# Altium PCB Module1.PcbDoc
Units mil, origin at the board's own origin, x right, y up, seen from the top; angles counter-clockwise.
Board outline 1610 x 1300 mil, 2 copper layers (Top Layer, Bottom Layer); 24 components, 25 nets, 148 pads, 47 vias.
Unrouted connection lines stored in the file: 46.
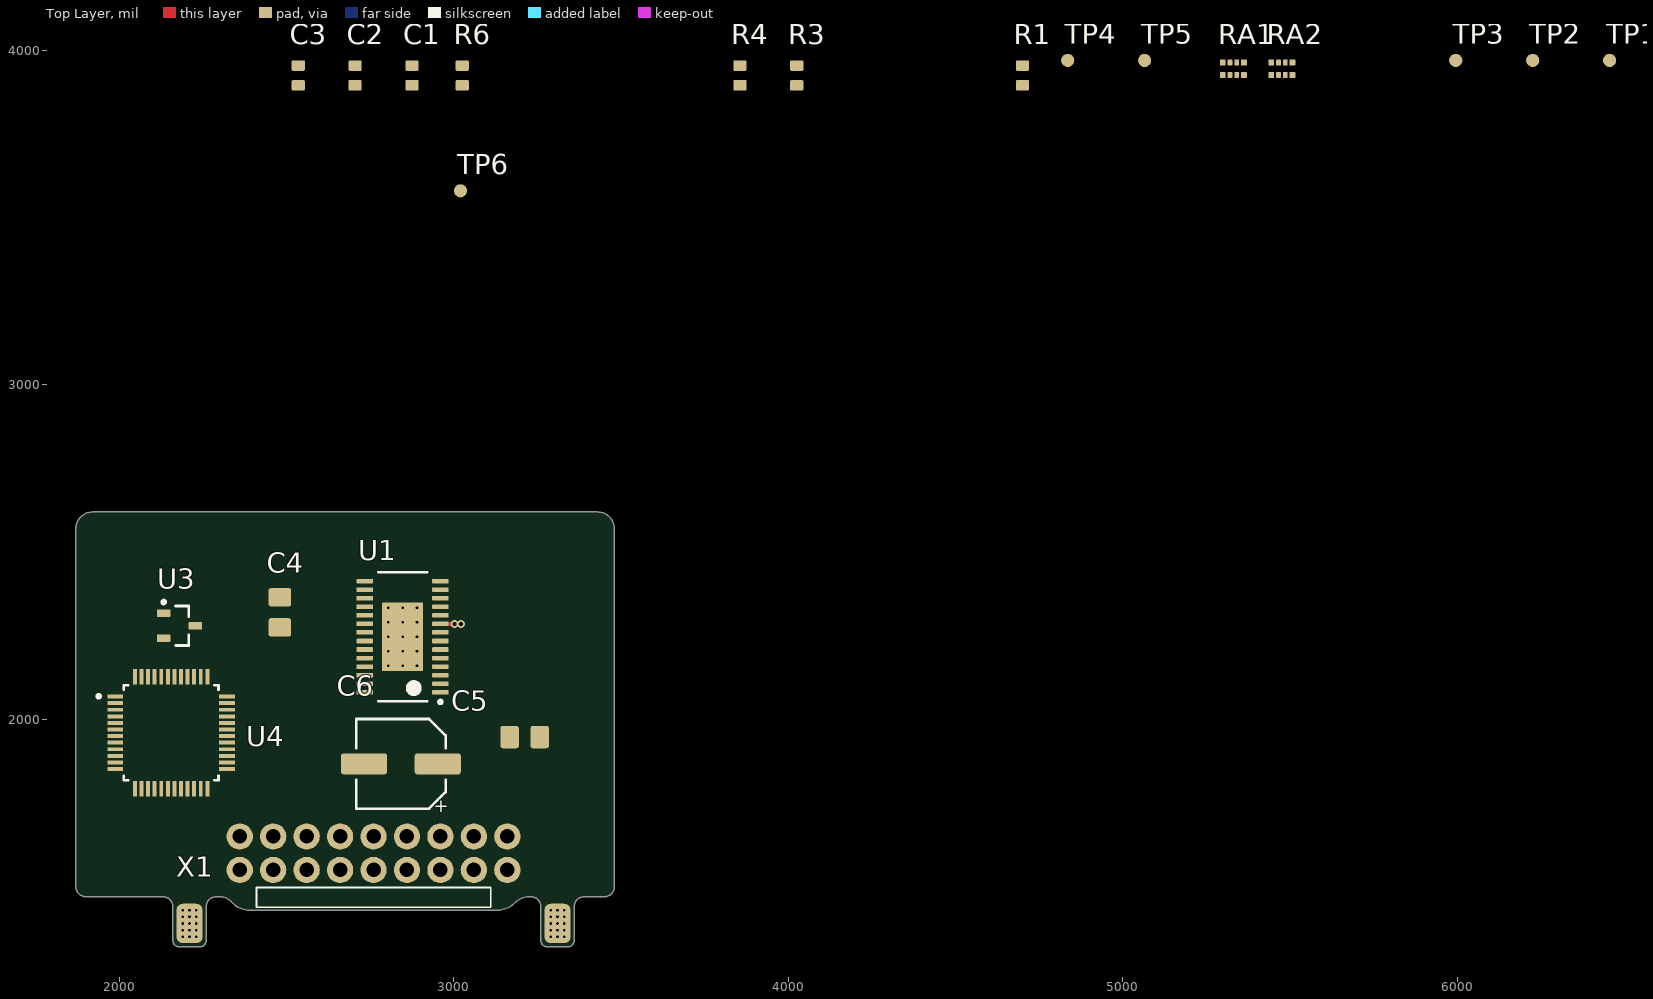
[diagram p0: Top Layer view]
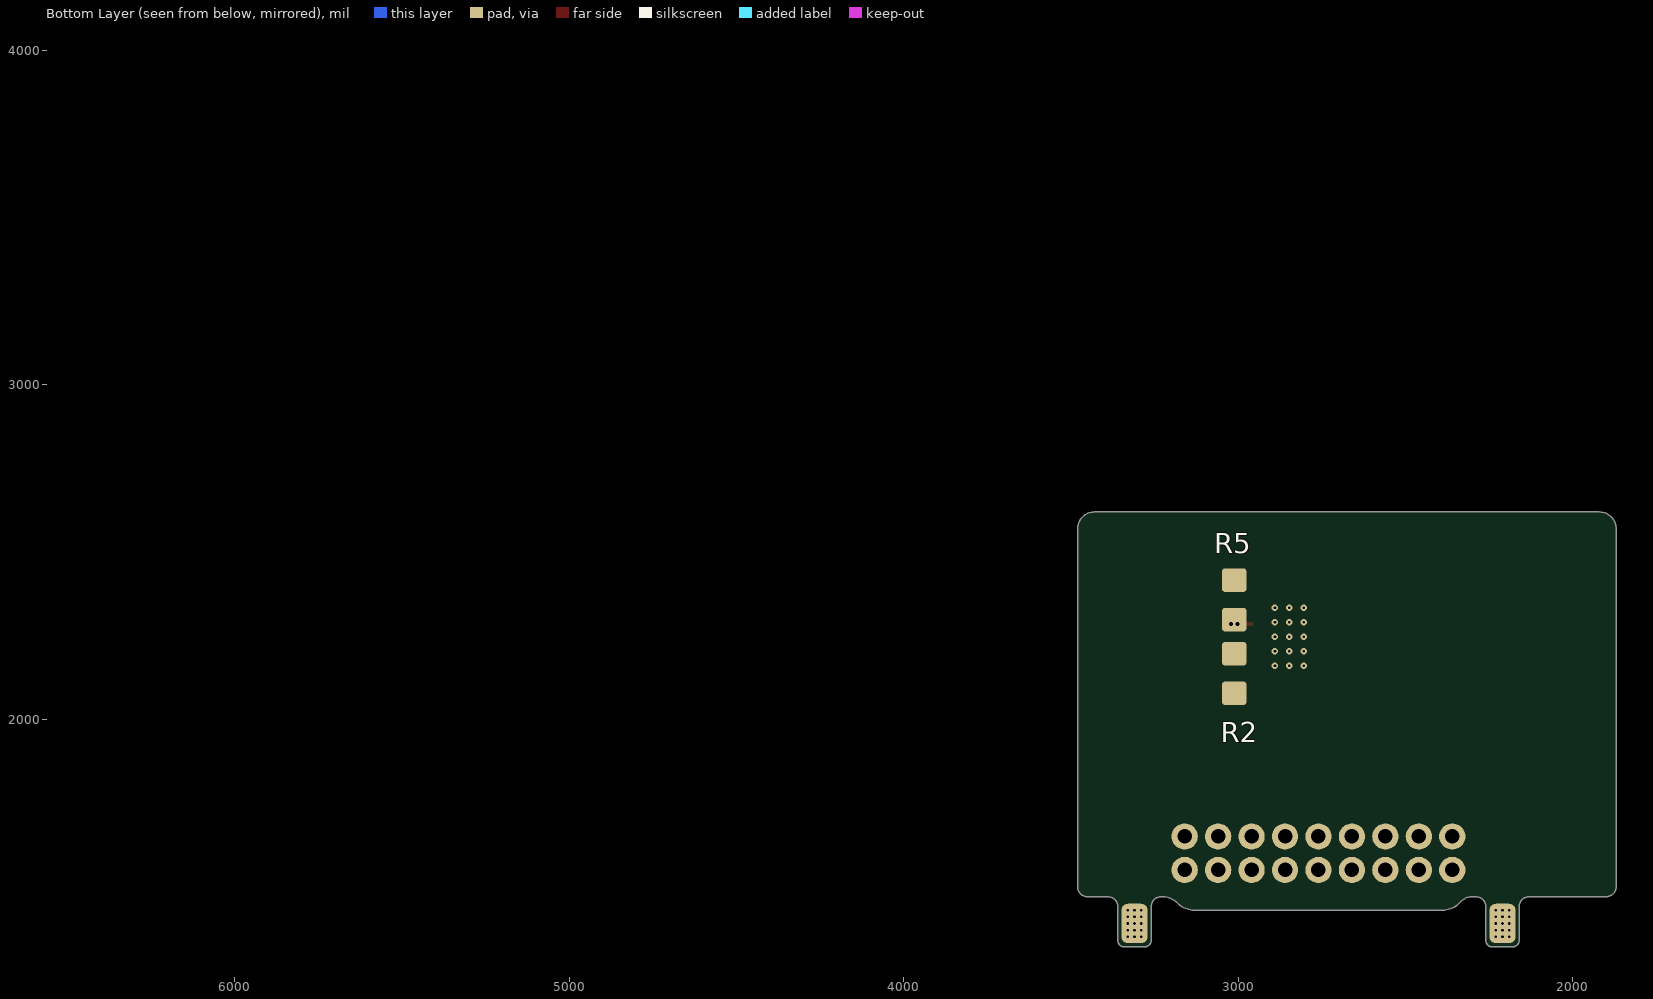
[diagram p1: Bottom Layer view, seen from below]

## Layer stack, top to bottom
Top Solder: solder mask 0.4, Solder Resist, Dk 3.5
Top Layer: signal copper 1.4
Dielectric 1: dielectric 12.6, FR-4, Dk 4.8
Bottom Layer: signal copper 1.4
Bottom Solder: solder mask 0.4, Solder Resist, Dk 3.5

## Board outline
2160,1340 ccw(c2180,1340) 2180,1320 2240,1320 ccw(c2240,1340) 2260,1340 2260,1440 cw(c2290,1440) 2290,1470 2300,1470 cw(c2300,1421.72) 2334.14,1455.86 2340,1450 ccw(c2388.28,1498.28) 2388.28,1430 3131.72,1430 ccw(c3131.72,1498.28) 3180,1450 cw(c3228.28,1401.72) 3228.28,1470 3230,1470 cw(c3230,1440) 3260,1440 3260,1340 ccw(c3280,1340) 3280,1320 3340,1320 ccw(c3340,1340) 3360,1340 3360,1440 cw(c3390,1440) 3390,1470 3450,1470 ccw(c3450,1500) 3480,1500 3480,2570 ccw(c3430,2570) 3430,2620 1920,2620 ccw(c1920,2570) 1870,2570 1870,1500 ccw(c1900,1500) 1900,1470 2130,1470 cw(c2130,1440) 2160,1440

## Design rules (kind name [scope] priority, off if disabled: settings)
AcuteAngle [All] p1: minimum=3.50000000000000E+0001 checktracksonly=FALSE
BoardOutlineClearance "BoardOutlineClearance 1" [All] p1: gap=9.84 ignorepadtopadclearanceinfootprint=FALSE except(0: Arc-SplitContinuation Track-SplitContinuation SMDPad-SplitContinuation THPad-SplitContinuation Via-SplitContinuation Fill-SplitContinuation Poly-SplitContinuation Region-SplitContinuation Text-SplitContinuation) // Milling
BoardOutlineClearance "BoardOutlineClearance 2" [All] p2: gap=15.75 ignorepadtopadclearanceinfootprint=FALSE except(0: Arc-SplitContinuation Track-SplitContinuation SMDPad-SplitContinuation THPad-SplitContinuation Via-SplitContinuation Fill-SplitContinuation Poly-SplitContinuation Region-SplitContinuation Text-SplitContinuation) // V-Cut
Clearance ADC_learance [InNetClass('ADC') vs NOT InNetClass('ADC')] p1: gap=39.37 ignorepadtopadclearanceinfootprint=FALSE
Clearance HV_clearance [InNetClass('Power_line') vs Not InNetClass('Power_line')] p2: gap=23.62 ignorepadtopadclearanceinfootprint=FALSE
Clearance "Clearance 105 um" [All] p3 off: gap=13.78 ignorepadtopadclearanceinfootprint=FALSE except(9.84: Arc-Hole Track-Hole SMDPad-Hole THPad-Hole Via-Hole Fill-Hole Poly-Hole Region-Hole Text-Hole)
Clearance "Clearance 70 um" [All] p4 off: gap=11.81 ignorepadtopadclearanceinfootprint=FALSE except(9.84: Arc-Hole Track-Hole SMDPad-Hole THPad-Hole Via-Hole Fill-Hole Poly-Hole Region-Hole Text-Hole)
Clearance "Clearance-1 35 um" [All] p5: gap=7.87 ignorepadtopadclearanceinfootprint=FALSE except(9.84: Arc-Hole Track-Hole SMDPad-Hole THPad-Hole Via-Hole Fill-Hole Poly-Hole Region-Hole Text-Hole) // Standart
Clearance "Clearance-2 35 um" [All] p6 off: gap=5.91 ignorepadtopadclearanceinfootprint=FALSE except(7.87: Arc-Fill Arc-Poly Track-Fill Track-Poly SMDPad-Fill SMDPad-Poly THPad-Fill THPad-Poly Via-Fill Via-Poly Fill-Fill Fill-Poly Poly-Poly; 9.84: Arc-Hole Track-Hole SMDPad-Hole THPad-Hole Via-Hole Fill-Hole Poly-Hole Region-Hole Text-Hole) // Advance
Clearance "Clearance-1 18 um" [All] p7 off: gap=4.92 ignorepadtopadclearanceinfootprint=FALSE except(7.87: Arc-Fill Arc-Poly Track-Fill Track-Poly SMDPad-SMDPad SMDPad-Fill SMDPad-Poly THPad-Fill THPad-Poly Via-Fill Via-Poly Fill-Fill Fill-Poly Poly-Poly Poly-Region Poly-Text; 9.84: Arc-Hole Track-Hole SMDPad-Hole THPad-Hole Via-Hole Fill-Hole Poly-Hole Region-Hole Text-Hole) // Standart
Clearance "Clearance-2 18 um" [All] p8 off: gap=3.94 ignorepadtopadclearanceinfootprint=FALSE except(5.91: Arc-Fill Arc-Poly Track-Fill Track-Poly SMDPad-SMDPad SMDPad-Fill SMDPad-Poly THPad-Fill THPad-Poly Via-Fill Via-Poly Fill-Fill Fill-Poly Poly-Poly Poly-Region Poly-Text; 9.84: Arc-Hole Track-Hole SMDPad-Hole THPad-Hole Via-Hole Fill-Hole Poly-Hole Region-Hole Text-Hole) // Advance
ComponentClearance [All] p1 off: gap=10 collisioncheckmode=3 verticalgap=10 showdistances=FALSE
DiffPairsRouting "DiffPairsRouting 35 um" [All] p1: maxlimit=10 minlimit=7.87 mostfreqgap=10 toplayer_minwidth=7.87 toplayer_maxwidth=15 toplayer_prefwidth=15 bottomlayer_minwidth=7.87 bottomlayer_maxwidth=15 bottomlayer_prefwidth=15 maxuncoupledlength=500
DiffPairsRouting "DiffPairsRouting 18 um" [All] p2 off: maxlimit=10 minlimit=3.94 mostfreqgap=10 toplayer_minwidth=3.94 toplayer_maxwidth=15 toplayer_prefwidth=15 bottomlayer_minwidth=3.94 bottomlayer_maxwidth=15 bottomlayer_prefwidth=15 maxuncoupledlength=500
HoleSize "Minimum HoleSize" [IsPad] p1: absolutevalues=TRUE maxlimit=232.28 minlimit=23.62 maxpercent=80.000 minpercent=20.000
HoleSize "Minimum HoleSize VIA 1" [IsVia] p2: absolutevalues=TRUE maxlimit=232.28 minlimit=11.81 maxpercent=80.000 minpercent=20.000 // Standart
HoleSize "Minimum HoleSize VIA 2" [IsVia] p3 off: absolutevalues=TRUE maxlimit=232.28 minlimit=7.87 maxpercent=80.000 minpercent=20.000 // Advance
HoleToHoleClearance Hole2HoleClearance [All] p1: gap=9.84 allowstackedmicrovias=FALSE
MinimumAnnularRing "Minimum AR VIA Standart" [All] p1: minimumring=5.91
MinimumAnnularRing "Minimum AR PAD Standart" [IsPAD] p2: minimumring=7.87
MinimumAnnularRing "Minimum AR VIA Advance" [IsVia] p3 off: minimumring=3.94
MinimumAnnularRing "Minimum AR PAD Advance" [IsPAD] p4 off: minimumring=5.91
MinimumSolderMaskSliver "SolderMask Bridge Standart" [All] p1: minsoldermaskwidth=5.91 // All Masks
MinimumSolderMaskSliver "SolderMask Bridge Advance" [All] p2 off: minsoldermaskwidth=3.94 // Mask LDI
PlaneClearance "PlaneClearance 105 um" [All] p1 off: clearance=13.78
PlaneClearance "PlaneClearance 70 um" [All] p2 off: clearance=11.81
PlaneClearance "PlaneClearance 35 um" [All] p3: clearance=7.87
PlaneClearance "PlaneClearance-1 18 um" [All] p4 off: clearance=7.87 // Standart
PlaneClearance "PlaneClearance-2 18 um" [All] p5 off: clearance=5.91 // Advance
PlaneConnect "TermalConnect 105 um" [All] p1 off: planeconnectstyle=Relief reliefexpansion=7.87 reliefentries=4 reliefconductorwidth=13.78 reliefairgap=13.78 // Standart
PlaneConnect "TermalConnect 70 um" [All] p2 off: planeconnectstyle=Relief reliefexpansion=7.87 reliefentries=4 reliefconductorwidth=11.81 reliefairgap=11.81 // Standart
PlaneConnect "TermalConnect-1 35 um" [All] p3: planeconnectstyle=Relief reliefexpansion=7.87 reliefentries=4 reliefconductorwidth=7.87 reliefairgap=7.87 // Standart
PlaneConnect "TermalConnect-2 35 um" [All] p4 off: pad.planeconnectstyle=Relief pad.reliefexpansion=5.91 pad.reliefentries=4 pad.reliefconductorwidth=7.87 pad.reliefairgap=7.87 via.planeconnectstyle=Direct via.reliefexpansion=5.91 via.reliefentries=4 via.reliefconductorwidth=5.91 via.reliefairgap=5.91 // Advance
PlaneConnect "TermalConnect-1 18 um" [All] p5 off: planeconnectstyle=Relief reliefexpansion=7.87 reliefentries=4 reliefconductorwidth=7.87 reliefairgap=7.87 // Standart
PlaneConnect "TermalConnect-2 18 um" [All] p6 off: pad.planeconnectstyle=Relief pad.reliefexpansion=5.91 pad.reliefentries=4 pad.reliefconductorwidth=5.91 pad.reliefairgap=5.91 via.planeconnectstyle=Direct via.reliefexpansion=5.91 via.reliefentries=4 via.reliefconductorwidth=5.91 via.reliefairgap=5.91 // Advance
PolygonConnect "PolygonConnect 105 um" [All] p1 off: thpad.connectstyle=Relief thpad.reliefconductorwidth=13.78 thpad.reliefentries=4 thpad.polygonreliefangle="90 Angle" thpad.airgapwidth=13.78 smdpad.connectstyle=Relief smdpad.reliefconductorwidth=13.78 smdpad.reliefentries=4 smdpad.polygonreliefangle="90 Angle" smdpad.airgapwidth=13.78 via.connectstyle=Direct via.reliefconductorwidth=10 via.reliefentries=4 via.polygonreliefangle="90 Angle" via.airgapwidth=10
PolygonConnect "PolygonConnect 70 um" [All] p2 off: thpad.connectstyle=Relief thpad.reliefconductorwidth=11.81 thpad.reliefentries=4 thpad.polygonreliefangle="90 Angle" thpad.airgapwidth=11.81 smdpad.connectstyle=Relief smdpad.reliefconductorwidth=11.81 smdpad.reliefentries=4 smdpad.polygonreliefangle="90 Angle" smdpad.airgapwidth=11.81 via.connectstyle=Direct via.reliefconductorwidth=10 via.reliefentries=4 via.polygonreliefangle="90 Angle" via.airgapwidth=10
PolygonConnect "PolygonConnect-1 35 um" [All] p3: thpad.connectstyle=Relief thpad.reliefconductorwidth=7.87 thpad.reliefentries=4 thpad.polygonreliefangle="90 Angle" thpad.airgapwidth=7.87 smdpad.connectstyle=Relief smdpad.reliefconductorwidth=7.87 smdpad.reliefentries=4 smdpad.polygonreliefangle="90 Angle" smdpad.airgapwidth=7.87 via.connectstyle=Direct via.reliefconductorwidth=10 via.reliefentries=4 via.polygonreliefangle="90 Angle" via.airgapwidth=10 // Standart
PolygonConnect "PolygonConnect-2 35 um" [All] p4 off: thpad.connectstyle=Relief thpad.reliefconductorwidth=5.91 thpad.reliefentries=4 thpad.polygonreliefangle="90 Angle" thpad.airgapwidth=5.91 smdpad.connectstyle=Relief smdpad.reliefconductorwidth=5.91 smdpad.reliefentries=4 smdpad.polygonreliefangle="90 Angle" smdpad.airgapwidth=5.91 via.connectstyle=Direct via.reliefconductorwidth=10 via.reliefentries=4 via.polygonreliefangle="90 Angle" via.airgapwidth=10 // Advance
PolygonConnect "PolygonConnect-1 18 um" [All] p5 off: thpad.connectstyle=Relief thpad.reliefconductorwidth=5.91 thpad.reliefentries=4 thpad.polygonreliefangle="90 Angle" thpad.airgapwidth=7.87 smdpad.connectstyle=Relief smdpad.reliefconductorwidth=7.87 smdpad.reliefentries=4 smdpad.polygonreliefangle="90 Angle" smdpad.airgapwidth=7.87 via.connectstyle=Direct via.reliefconductorwidth=10 via.reliefentries=4 via.polygonreliefangle="90 Angle" via.airgapwidth=10 // Standart
PolygonConnect "PolygonConnect-2 18 um" [All] p6 off: thpad.connectstyle=Relief thpad.reliefconductorwidth=4.92 thpad.reliefentries=4 thpad.polygonreliefangle="90 Angle" thpad.airgapwidth=5.91 smdpad.connectstyle=Relief smdpad.reliefconductorwidth=4.92 smdpad.reliefentries=4 smdpad.polygonreliefangle="90 Angle" smdpad.airgapwidth=5.91 via.connectstyle=Direct via.reliefconductorwidth=10 via.reliefentries=4 via.polygonreliefangle="90 Angle" via.airgapwidth=10 // Advance
RoutingCorners [All] p1 off: cornerstyle=45-Degree minsetback=10 maxsetback=40
RoutingVias [All] p1: holewidth=11.81 width=23.62 viastyle="Through Hole" minholewidth=7.87 minwidth=15.75 maxholewidth=232.28 maxwidth=251.97 useviatemplates=TRUE viatemplateguid#1={AE845DF9-3FED-4E5E-92F2-E0E628AD4687} viatemplateguid#2={337630FC-0759-4CC8-9604-1508595804AC} viatemplateguid#3={EA74E89B-64FA-4022-B86A-771B67B55223} viatemplatename#1=v40h20m0mx0 viatemplatename#2=v50h20 viatemplatename#3=v60h30m0mx0
SilkToSilkClearance Silk2SilkClearance [All] p1 off: silktosilkclearance=5.91
SilkToSolderMaskClearance Silk2SolderMaskClearance [IsPad] p1 off: minsilkscreentomaskgap=5.91 clearancetoexposedcopper=TRUE
SolderMaskExpansion SolderMaskExpansion-1 [All] p1: expansion=1.97 // Standart
SolderMaskExpansion "SolderMaskExpansion LDI" [All] p2 off: expansion=0.98 // Advance
UnRoutedNet [All] p1: checkbadconnections=TRUE
UnpouredPolygon [All] p1: allowunpoured=TRUE allowshelved=TRUE
Width "Width 105 um" [All] p1 off: maxlimit=393.7 minlimit=13.78 preferedwidth=15.75 checkconnectedcopper=TRUE
Width "Width 70 um" [All] p2 off: maxlimit=393.7 minlimit=11.81 preferedwidth=13.78 minimp=50.000000 maximp=50.000000 favimp=50.000000 checkconnectedcopper=TRUE
Width "Width 35 um" [All] p3: maxlimit=393.7 minlimit=5.91 preferedwidth=7.87
Width "Width 18 um" [All] p4 off: maxlimit=393.7 minlimit=3.94 preferedwidth=4.92 checkconnectedcopper=TRUE
18 further rules are at their usual default settings.

## Classes and differential pairs
component class U_Motor_Module: C1 C2 C3 C4 C5 C6 R1 R2 R3 R4 R5 R6 RA1 RA2 TP1 TP2 TP3 TP4 TP5 TP6 U1
component class Sheet1: U3 U4 X1

## Components (designator, comment, footprint, x,y, rotation, side; value= is the part's Value field where it differs from the comment)
C1 "0,47 мк" CAP_0603 2875,3925 r90 top
C2 "10 н" CAP_0603 2705,3925 r90 top
C3 "0,1 мк" CAP_0603 2535,3925 r90 top
C4 "0,47 мк" CAP_0805 2480,2320 r90 top
C5 "0,1 мк" CAP_0805 3211.81,1947.2 r0 top
C6 "47 мк" CAP_AE_SMD_D6MM3_H5M55 2841.81,1867.2 r180 top
R1 "10 к" RES_0603 4700,3925 r90 top
R2 "100 мОм" RES_1206 3011.81,2137.2 r270 bottom
R3 "10 к" RES_0603 4025,3925 r90 top
R4 "1,5 к" RES_0603 3855,3925 r90 top
R5 "100 мОм" RES_1206 3011.81,2357.2 r90 bottom
R6 "1 к" RES_0603 3025,3925 r90 top
RA1 "RES_ARR-XB-28V" EXB-28V 5330,3945 r90 top
RA2 "RES_ARR-XB-28V" EXB-28V 5475,3945 r90 top
TP1 "SUP" PAD_RND_1MM 6455,3970 r90 top
TP2 "SUP" PAD_RND_1MM 6225,3970 r90 top
TP3 "GND" PAD_RND_1MM 5995,3970 r90 top
TP4 "DECAY" PAD_RND_1MM 4835,3970 r90 top
TP5 "NHOME" PAD_RND_1MM 5065,3970 r90 top
TP6 "CURRENT" PAD_RND_1MM 3020,3580 r90 top
U1 "DRV8825PWP" PWP0028C_L 2846.81,2247.2 r180 top
U3 "REF3030AIDBZR" DBZ0003A_N 2180,2280 r0 top
U4 "STM32G431CBT6" FP-LQFP48-5B-MFG 2155,1960 r0 top
X1 "CNC_PCB_PCB" CNC_PCB_PCB 2360,1650 r0 top locked

## Footprints (in the part's own frame and the unit in brackets; to place one, negate y for a bottom-side part, rotate by r counter-clockwise, add the part's x,y. Pads: shape width x height; smd on the part's side, far side on the other; paste and mask are expansions set on the pad)
CAP_0603 [mm]
  rrect25% 0.8x1 smd: 1(-0.75,0) 2(0.75,0)
  body extent -0.8,-0.4 0.8,0.4, height 0.51
CAP_0805 [mm]
  rrect25% 1.4x1.7 smd: 1(-1.143,0) 2(1.143,0)
  body extent -1.15,-0.76 1.15,0.79, height 1.01
CAP_AE_SMD_D6MM3_H5M55 [mm] "Aluminum Electrolytic Capacitor, Body 6.30x6.60x5.50mm, IPC Low Density"
  rrect25% 3.5x1.6 smd: 1(-2.8,0) 2(2.8,0)
  silkscreen extent -3.4,-3.4 3.4,3.4, body extent -3.4,-3.4 3.4,3.4, height 5.5
CNC_PCB_PCB [mm]
  round 2 hole 1.1: 1(0,0) 2(0,-2.54) 3(2.54,0) 4(2.54,-2.54) 5(5.08,0) 6(5.08,-2.54) 7(7.62,0) 8(7.62,-2.54) 9(10.16,0) 10(10.16,-2.54) 11(12.7,0) 12(12.7,-2.54) 13(15.24,0) 14(15.24,-2.54) 15(17.78,0) 16(17.78,-2.54) 17(20.32,-2.54) 17(20.32,0)
  rrect50% 2x3 smd: 18(-3.81,-6.604) 18(24.13,-6.604)
  rrect50% 2x3 smd far side: 18(-3.81,-6.604) 18(24.13,-6.604)
  silkscreen extent 1.27,-5.37 19.05,-3.87
DBZ0003A_N [mm] "SOT23, 3-Leads, Body 3.04x1.4mm, Pitch 0.95mm, IPC Medium Density"
  rrect17% 1x0.6 smd: 1(-1.2,0.95) 2(-1.2,-0.95) 3(1.2,0)
  silkscreen extent -1.32,-1.5 0.7,1.92, body extent -1.26,-1.46 1.26,1.46, height 0.96
EXB-28V [mm]
  rrect25% 0.45x0.45 smd mask+0.1: 1(-0.475,0.8) 4(-0.475,-0.8) 5(0.475,-0.8) 8(0.475,0.8)
  rrect25% 0.45x0.35 smd mask+0.1: 2(-0.475,0.25) 3(-0.475,-0.25) 6(0.475,-0.25) 7(0.475,0.25)
  body extent -0.5,-1 0.5,1, height 0.45
FP-LQFP48-5B-MFG [mm]
  rect 1.2x0.3 smd paste+0 mask+0: 1(-4.25,2.75) 2(-4.25,2.25) 3(-4.25,1.75) 4(-4.25,1.25) 5(-4.25,0.75) 6(-4.25,0.25) 7(-4.25,-0.25) 8(-4.25,-0.75) 9(-4.25,-1.25) 10(-4.25,-1.75) 11(-4.25,-2.25) 12(-4.25,-2.75) 25(4.25,-2.75) 26(4.25,-2.25) 27(4.25,-1.75) 28(4.25,-1.25) 29(4.25,-0.75) 30(4.25,-0.25) 31(4.25,0.25) 32(4.25,0.75) 33(4.25,1.25) 34(4.25,1.75) 35(4.25,2.25) 36(4.25,2.75)
  rect 0.3x1.2 smd paste+0 mask+0: 13(-2.75,-4.25) 14(-2.25,-4.25) 15(-1.75,-4.25) 16(-1.25,-4.25) 17(-0.75,-4.25) 18(-0.25,-4.25) 19(0.25,-4.25) 20(0.75,-4.25) 21(1.25,-4.25) 22(1.75,-4.25) 23(2.25,-4.25) 24(2.75,-4.25) 37(2.75,4.25) 38(2.25,4.25) 39(1.75,4.25) 40(1.25,4.25) 41(0.75,4.25) 42(0.25,4.25) 43(-0.25,4.25) 44(-0.75,4.25) 45(-1.25,4.25) 46(-1.75,4.25) 47(-2.25,4.25) 48(-2.75,4.25)
  silkscreen extent -5.62,-3.6 3.6,3.6, body extent -4.95,-4.95 4.95,4.95, height 0.25
PAD_RND_1MM [mm]
  round 1 smd paste-0.5 mask+0: 1(0,0)
PWP0028C_L [mm] "SOP, 28-Leads, Body 9.8x4.5mm, Pitch 0.65mm, Thermal Pad 5.18x3.1mm, IPC High Density"
  rrect29% 1.25x0.35 smd: 1(-2.875,4.225) 2(-2.875,3.575) 3(-2.875,2.925) 4(-2.875,2.275) 5(-2.875,1.625) 6(-2.875,0.975) 7(-2.875,0.325) 8(-2.875,-0.325) 9(-2.875,-0.975) 10(-2.875,-1.625) 11(-2.875,-2.275) 12(-2.875,-2.925) 13(-2.875,-3.575) 14(-2.875,-4.225) 15(2.875,-4.225) 16(2.875,-3.575) 17(2.875,-2.925) 18(2.875,-2.275) 19(2.875,-1.625) 20(2.875,-0.975) 21(2.875,-0.325) 22(2.875,0.325) 23(2.875,0.975) 24(2.875,1.625) 25(2.875,2.275) 26(2.875,2.925) 27(2.875,3.575) 28(2.875,4.225)
  rrect3% 3.1x5.18 smd: 29(0,0)
  silkscreen extent -3,-4.9 1.85,5.07, body extent -2.25,-4.9 2.25,4.9, height 1.2
RES_0603 [mm]
  rrect25% 0.8x1 smd: 1(-0.75,0) 2(0.75,0)
  body extent -0.8,-0.43 0.8,0.43, height 0.52
RES_1206 [mm]
  rrect25% 1.8x1.84 smd: 1(-1.5,0) 2(1.5,0)
  body extent -1.6,-0.83 1.6,0.83, height 0.57

## Part data
C1 C2: library part CAP_0805, "Capacitor SMD 0805", Type=CAP_CERAMIC
C3 C4 C5: library part CAP_0805, "Capacitor SMD 0805", Voltage=50, Type=CAP_CERAMIC
C6: library part CAP_ALEL_6.3x5.5, "Capacitor SMD Aluminium Electrolytic 6.3mm Diameter 5.5mm Height", Voltage=50, ChipDip=9000565731, Type=CAP_ELECTROLYTIC
R1 R3 R4 R6: library part RES_0805, "Resistor SMD 0805", Type=RESISTOR
R2 R5: library part RES_1206, "Resistor SMD 1206", Type=RESISTOR
RA1 RA2: "Resistor Array 0402 4 Elements Panasonic EXB-28V", Manufacturer=Panasonic
TP1 TP2 TP3 TP4 TP5 TP6: library part TEST_POINT_RND_1MM, "Test Point Round 1mm (NO BOM)"
  TP1 TP2: CustomTxt=SUP
  TP3: CustomTxt=GND
  TP4: CustomTxt=DECAY
  TP5: CustomTxt=NHOME
  TP6: CustomTxt=CURRENT
U1: library part CMP-1685-00019-1, "Stepper Motor Controller IC, 8.2 to 45 V, -40 to 85 degC, 28-Pin HTSSOP (PWP), Green (RoHS & no Sb/Br), Tube", ComponentLink1Description="Manufacturer URL", ComponentLink1URL=http://www.ti.com/, ComponentLink2Description=Datasheet, ComponentLink2URL=http://www.ti.com/general/docs/lit/getliterature.tsp?genericPartNumber=DRV8825&fileType=pdf, Model=DRV8825PWP, Type=IC
U3: library part CMP-0367-00160-2, "2.048 V, 50 ppm / degC, 50 uA Series (Bandgap) Voltage Reference, -40 to 125 degC, 3-pin SOT-23 (DBZ), Green (RoHS & no Sb/Br)", ComponentLink1Description="Manufacturer URL", ComponentLink1URL=http://www.ti.com/, ComponentLink2Description=Datasheet, ComponentLink2URL=http://www.ti.com/general/docs/lit/getliterature.tsp?genericPartNumber=REF3020&fileType=pdf, ComponentLink3Description="Package Specification", ComponentLink3URL=http://www.ti.com/litv/pdf/mpds108a, ComponentLink4Description="URL Link1", ComponentLink4URL="Samples URL:http://www.ti.com/product/ref3020", Model=REF3030AIDBZR, Type=IC
U4: library part CMP-12105-000030-1, "MAINSTREAM ARM CORTEX-M4+ MCU 17", Ambient Temperature Range High=+85°C, Ambient Temperature Range Low=-40°C, Frequency=170MHz, Manufacturer=STMicroelectronics, Max Junction Temp=+105°C, Max Supply Voltage=3.6V, Min Supply Voltage=1.62V, Package=LQFP48-5B, Temperature="-40°C to +85°C", Automotive=No, Category=IC, ComponentLink2Description=Datasheet, ComponentLink2URL=https://www.st.com/resource/en/datasheet/stm32g431cb.pdf, Core Architecture="Arm Cortex-M4", Data Bus Width=32bits, Device Class L1="Integrated Circuits (ICs)", Device Class L2="Embedded Processors and Controllers", Device Class L3=Microcontrollers, Digikey Description="MAINSTREAM ARM CORTEX-M4+ MCU 17", Height=1.6mm, Interface=I2C,SPI,UART,USART,CAN,USB,LIN,IrDA,I2S, Lead Free=Yes, Manufacturer Part Number=STM32G431CBT6, Memory Size=128KBytes, Memory Type=FLASH, Number Of A/D Converters=1, Number Of Adc Channels=17, Number Of Cores=1, Number Of I2C Channels=3, Number Of I/Os=38, Number Of Pwm Channels=31, Number Of Spi Channels=3, Number Of Timers/Counters=14, Number Of Uart Channels=4, Number Of Usb Channels=1, Octopart=https://octopart.com/stm32g431cbt6-stmicroelectronics-98835224, Ram Size=32KBytes, RoHS=TRUE, Standoff Height=0.05mm, Temperature Range High=+85°C, Temperature Range Low=-40°C

## Via types
v1: diameter 15.75, hole 7.87, Top Layer to Bottom Layer, tented both sides, 30 vias
v2: diameter 19.68, hole 7.87, Top Layer to Bottom Layer, 15 vias
v3: diameter 23.62, hole 11.81, Top Layer to Bottom Layer, tented both sides, 2 vias

## Nets (pads, with @x,y where several pads share a name; then routed paths per layer and width w, separated by ;. In a path a pad name is that pad's centre, name@x,y a point inside that pad or via, vN(x,y) a via of type N, cw(c..) or ccw(c..) an arc to the next point about the centre after c; other vN are vias at no path point)
3.3V: R1.1 TP2.1
CURRENT_REF: R6.1 TP6.1 U1.12 U1.13
GND: C1.2 C4.2 C5.2 C6.2 R2.2 R5.2 R6.2 RA1.5 RA1.6 RA1.7 RA1.8 RA2.5 RA2.6 RA2.7 RA2.8 TP3.1 U1.14 U1.28 U1.29
  other v2: 2803.5,2160.59 2846.81,2160.59 2890.12,2160.59 2803.5,2203.9 2846.81,2203.9 2890.12,2203.9 2803.5,2247.2 2846.81,2247.2 2890.12,2247.2 2803.5,2290.51 2846.81,2290.51 2890.12,2290.51 2803.5,2333.82 2846.81,2333.82 2890.12,2333.82
NetC1_1: C1.1 U1.15
NetC2_1: C2.1 U1.1
NetC2_2: C2.2 U1.2
NetC3_2: C3.2 U1.3
NetR1_2: R1.2 U1.21
NetR2_1: R2.1 U1.6
NetR3_1: R3.1 R4.2 U1.16 U1.17
NetR3_2: R3.2 RA2.1
NetR4_1: R4.1 U1.18
NetR5_1: R5.1 U1.9 | length 81.8
  Top Layer w11.81: U1.9 v3(3001.81,2285.59) v3(3021.81,2285.59)
  Bottom Layer w11.81: v3(3001.81,2285.59) v3(3021.81,2285.59)
NetRA1_3: RA1.3 U1.22
NetRA1_4: RA1.4 U1.20
NetRA2_2: RA2.2 U1.24
NetRA2_3: RA2.3 U1.25
NetRA2_4: RA2.4 U1.26
NetTP4_1: TP4.1 U1.19
NetTP5_1: TP5.1 U1.27
NetU1_5: U1.5
NetU1_7: U1.7
NetU1_8: U1.8
NetU1_10: U1.10
VCC: C3.1 C4.1 C5.1 C6.1 TP1.1 U1.4 U1.11
pads on no net: RA1.1 RA1.2 U1.23 U3.1 U3.2 U3.3 U4.1 U4.2 U4.3 U4.4 U4.5 U4.6 U4.7 U4.8 U4.9 U4.10 U4.11 U4.12 U4.13 U4.14 U4.15 U4.16 U4.17 U4.18 U4.19 U4.20 U4.21 U4.22 U4.23 U4.24 U4.25 U4.26 U4.27 U4.28 U4.29 U4.30 U4.31 U4.32 U4.33 U4.34 U4.35 U4.36 U4.37 U4.38 U4.39 U4.40 U4.41 U4.42 U4.43 U4.44 U4.45 U4.46 U4.47 U4.48 X1.1 X1.2 X1.3 X1.4 X1.5 X1.6 X1.7 X1.8 X1.9 X1.10 X1.11 X1.12 X1.13 X1.14 X1.15 X1.16 X1.17 X1.18
copper on no net:
  other v1: 2190,1350 2210,1350 2230,1350 3290,1350 3310,1350 3330,1350 2190,1370 2210,1370 2230,1370 3290,1370 3310,1370 3330,1370 2190,1390 2210,1390 2230,1390 3290,1390 3310,1390 3330,1390 2190,1410 2210,1410 2230,1410 3290,1410 3310,1410 3330,1410 2190,1430 2210,1430 2230,1430 3290,1430 3310,1430 3330,1430

## Silkscreen, mask and mechanical layers (free items; w line width, h text height)
Board:
  lines w3.94: 1870,1500 ccw(c1900,1500) 1900,1470 2130,1470 cw(c2130,1440) 2160,1440 2160,1340 ccw(c2180,1340) 2180,1320 2240,1320 ccw(c2240,1340) 2260,1340 2260,1440 cw(c2290,1440) 2290,1470 2300,1470 cw(c2300,1421.72) 2334.14,1455.86 2340,1450 ccw(c2388.28,1498.28) 2388.28,1430 3131.72,1430 ccw(c3131.72,1498.28) 3180,1450 cw(c3228.28,1401.72) 3228.28,1470 3230,1470 cw(c3230,1440) 3260,1440 3260,1340 ccw(c3280,1340) 3280,1320 3340,1320 ccw(c3340,1340) 3360,1340 3360,1440 cw(c3390,1440) 3390,1470 3450,1470 ccw(c3450,1500) 3480,1500 3480,1560 3480,2570 ccw(c3430,2570) 3430,2620 1920,2620 ccw(c1920,2570) 1870,2570 1870,1560 1870,1500

## Text inside footprints (layer, text, board x,y; h text height)
C6: Mechanical 13 "+" at 2984.85,1756.96 h39.37 r180; Top Overlay "+" at 2984.85,1756.96 h39.37 r180